# Altium PCB STM32 Home Automation.PcbDoc
Units mil, origin at the board's own origin, x right, y up, seen from the top; angles counter-clockwise.
Board outline 3639.49 x 2458.52 mil, 2 copper layers (Top Layer, Bottom Layer); 35 components, 55 nets, 218 pads, 83 vias.
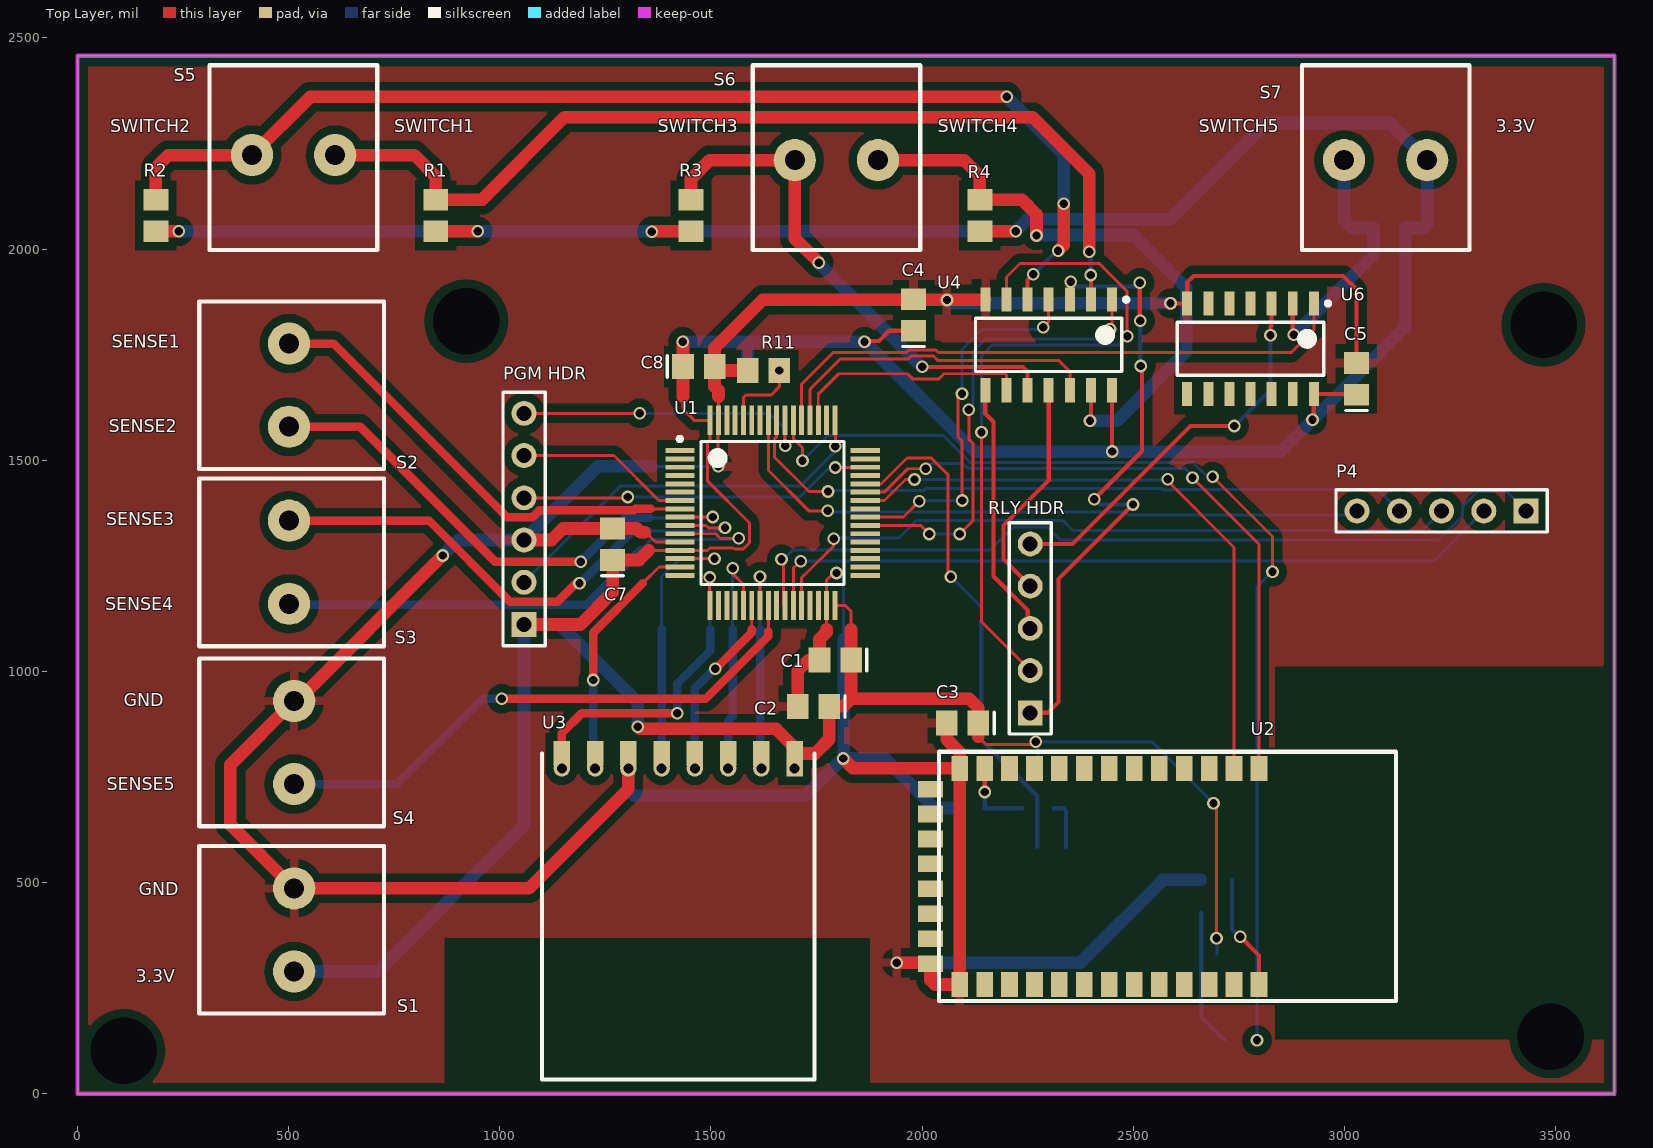
[diagram p0: Top Layer view]
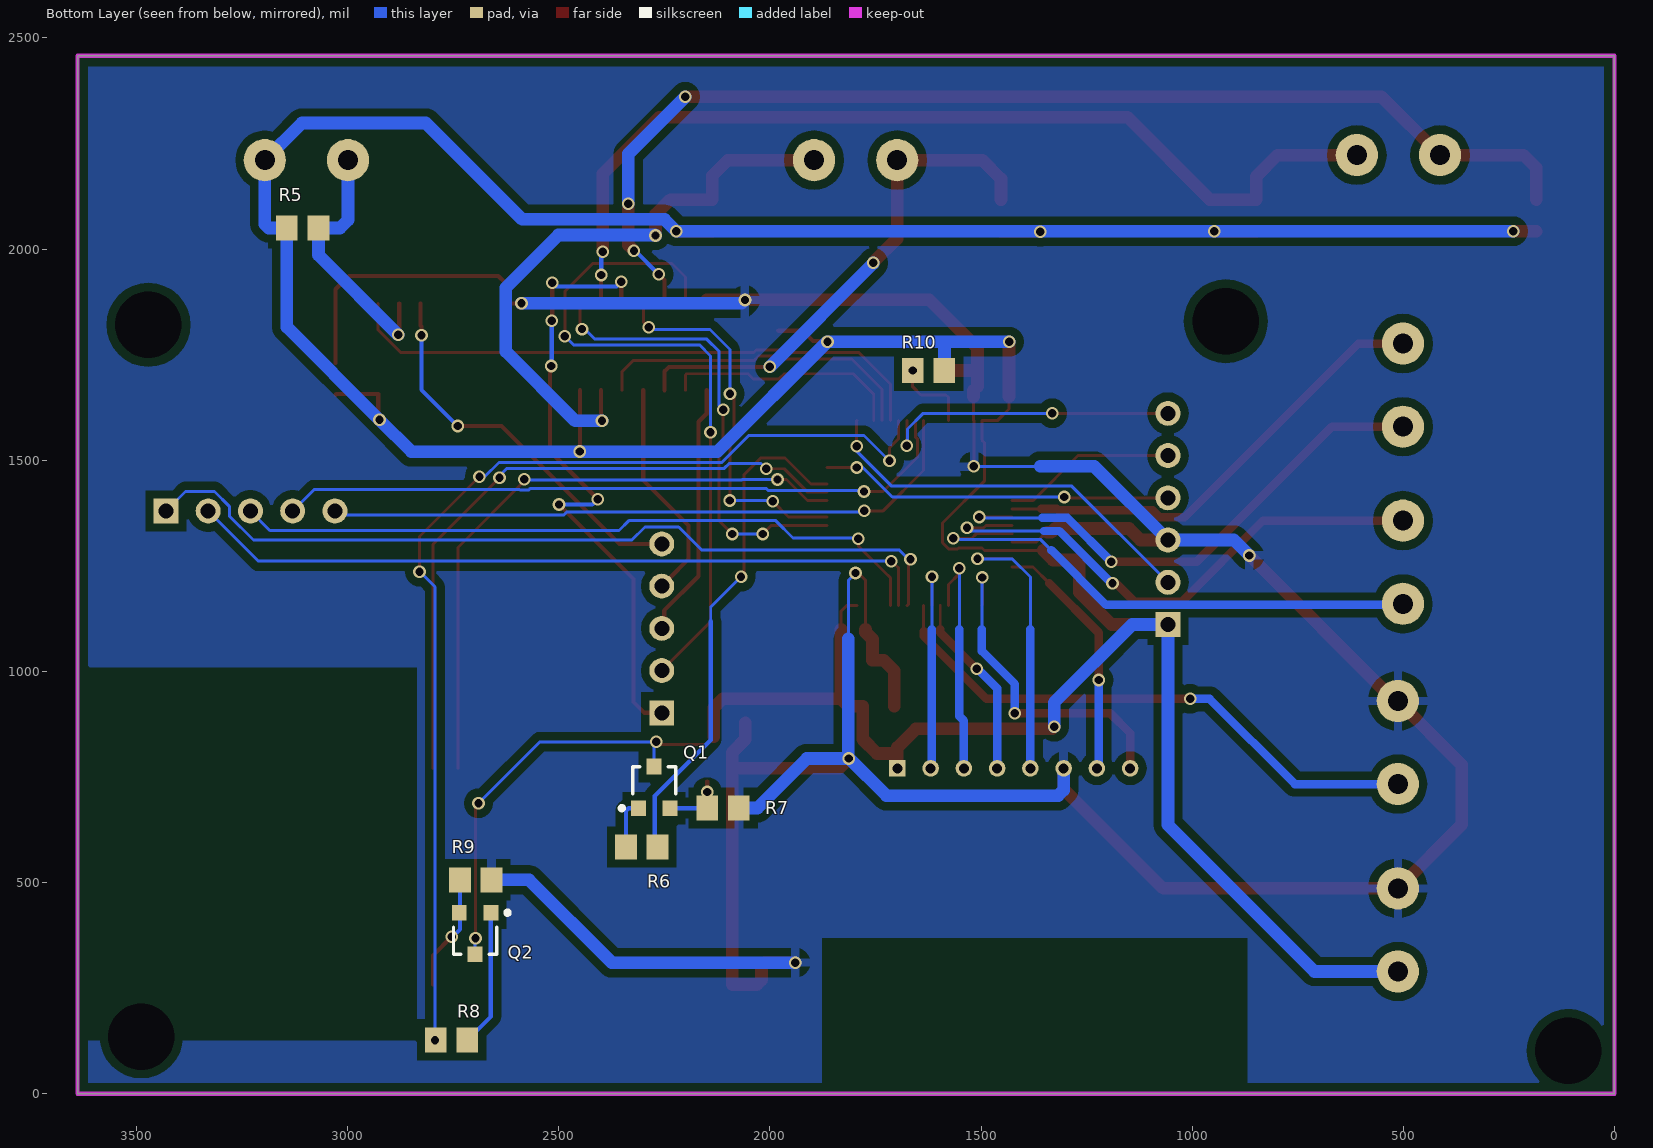
[diagram p1: Bottom Layer view, seen from below]

## Layer stack, top to bottom
Top Solder: solder mask 0.4, Solder Resist, Dk 3.5
Top Layer: signal copper 1.4
Dielectric 1: dielectric 12.6, FR-4, Dk 4.8
Bottom Layer: signal copper 1.4
Bottom Solder: solder mask 0.4, Solder Resist, Dk 3.5

## Board outline
0,0 0,2458.52 3639.49,2458.52 3639.49,0 0,0

## Design rules (kind name [scope] priority, off if disabled: settings)
Clearance [All] p1: gap=7 except(20: Fill-Poly Via-Poly SMDPad-Poly THPad-Poly Track-Poly)
PolygonConnect [All] p1: connectstyle=Relief reliefconductorwidth=20 reliefentries=4 polygonreliefangle="90 Angle" airgapwidth=20
RoomDefinition "STM32 Home Automation" [InComponentClass('STM32 Home Automation')] p1: confinementstyle=ConfineIn formatcopy=TRUE lockcomponents=FALSE outline 0,0 3639.49,0 3639.49,2458.52 0,2458.52
RoutingVias [All] p1: holewidth=19.68 width=30 viastyle="Through Hole" minholewidth=19.68 minwidth=30 maxholewidth=19.68 maxwidth=30
SMDNeckDown [All] p1: percent=70.000
SolderMaskExpansion [All] p1: expansion=4
SupplyNets [InNet('3.3V')] p1: voltage=3.300
UnpouredPolygon [All] p1: allowunpoured=FALSE
Width Sense [InNet('SENSE1','SENSE2','SENSE3','SENSE4','SENSE5')] p1: maxlimit=20 minlimit=7 preferedwidth=20
Width Power [InNet('3.3V','GND','SW_OUT1','SW_OUT2','SW_OUT3','SW_OUT4','SW_OUT5')] p2: maxlimit=60 minlimit=7 preferedwidth=30
Width [All] p3: maxlimit=20 minlimit=7 preferedwidth=7
29 further rules are at their usual default settings.

## Components (designator, comment, footprint, x,y, rotation, side; value= is the part's Value field where it differs from the comment)
C1 "100nF" 0805 1794.33,1026.88 r180 top
C2 "100nF" 0805 1742.77,917.21 r180 top
C3 "100nF" 0805 2095.67,878.12 r180 top
C4 "100nF" 0805 1980.03,1844.38 r90 top
C5 "100nF" 0805 3028.27,1692.85 r90 top
C7 "100nF" 0805 1267.07,1301.2 r90 top
C8 "100nF" 0805 1471.15,1721.64 r0 top
P4 "Header 5" HDR1X5 3430,1380 r180 top
"PGM HDR" "Header 6" HDR1X6 1057.43,1111.15 r90 top
Q1 "BC847ALT1" 318-08 2273.89,725.48 r180 bottom
Q2 "BC847ALT1" 318-08 2698.17,379.59 r0 bottom
R1 "100K" ERA-0805 848.3,2079.57 r90 top
R2 "100K" ERA-0805 185.42,2079.57 r90 top
R3 "100K" ERA-0805 1452.82,2079.57 r90 top
R4 "100K" ERA-0805 2136.59,2079.57 r90 top
R5 "100K" ERA-0805 3106.29,2049.99 r180 bottom
R6 "10K" ERA-0805 2303.42,584.49 r0 bottom
R7 "100K" ERA-0805 2110.73,676.63 r0 bottom
R8 "10K" ERA-0805 2753.58,127.66 r0 bottom
R9 "470E" ERA-0805 2696.49,506.4 r180 bottom
R10 "10K" ERA-0805 1624.08,1712.74 r0 bottom
R11 "470E" ERA-0805 1624.38,1712.47 r180 top
"RLY HDR" "Header 5" HDR1X5 2255.98,902.01 r90 top locked
S1 "Screw Terminal" "Screw Terminal" 513.04,290 r90 top
S2 "Screw Terminal" "Screw Terminal" 501.04,1775.92 r270 top
S3 "Screw Terminal" "Screw Terminal" 501.04,1356.59 r270 top
S4 "Screw Terminal" "Screw Terminal" 513.04,733.7 r90 top
S5 "Screw Terminal" "Screw Terminal" 609.68,2222.69 r180 top
S6 "Screw Terminal" "Screw Terminal" 1698.89,2210.69 r0 top
S7 "Screw Terminal" "Screw Terminal" 2999.56,2210.69 r0 top
U1 "STM32F051R8T6" STM32F051R8T6 1645.78,1375.27 r0 top
U2 "Bluetooth" Bluetooth 2797.58,770.67 r270 top
U3 "CC2500" CC2500 1698.04,770.6 r180 top
U4 "SN74LV86A" "SN74LV86A, SOIC127P600X175-14N" 2299.66,1773.16 r270 top
U6 "SN74LV86A" "SN74LV86A, SOIC127P600X175-14N" 2777.6,1764.06 r270 top

## Footprints (in the part's own frame and the unit in brackets; to place one, negate y for a bottom-side part, rotate by r counter-clockwise, add the part's x,y. Pads: shape width x height; smd on the part's side, far side on the other; paste and mask are expansions set on the pad)
318-08 [mm] "SOT-23; 3 Leads; Body 3.0 x 2.6 mm, inc. leads (LxW max)"
  rect 0.9x0.95 smd: 1(-0.95,-1.25) 2(0.95,-1.25) 3(0,1.25)
  silkscreen extent -2.08,-1.37 1.3,1.25
0805 [mm] "Chip Capacitor; Body 2.0 x 1.2 mm (LxW typ)"
  rect 1.3x1.5 smd: 1(-0.95,0) 2(0.95,0)
  silkscreen extent -1.9,-0.65 -1.9,0.65
Bluetooth [mm]
  rect 1.5x1 smd: 1(0,0) 2(0,-1.5) 3(0,-3) 4(0,-4.5) 5(0,-6) 6(0,-7.5) 7(0,-9) 8(0,-10.5) 9(0,-12) 10(0,-13.5) 11(0,-15) 12(0,-16.5) 13(0,-18) 22(13,-18) 23(13,-16.5) 24(13,-15) 25(13,-13.5) 26(13,-12) 27(13,-10.5) 28(13,-9) 29(13,-7.5) 30(13,-6) 31(13,-4.5) 32(13,-3) 33(13,-1.5) 34(13,0)
  rect 1x1.5 smd: 14(1.25,-19.75) 15(2.75,-19.75) 16(4.25,-19.75) 17(5.75,-19.75) 18(7.25,-19.75) 19(8.75,-19.75) 20(10.25,-19.75) 21(11.75,-19.75)
  silkscreen extent -1,-19.25 14,8.25
CC2500 [mm]
  rect 1x1 hole 0.6: 1(0,0)
  rect 1x1.5 smd: 1(0,-0.889) 2(2,-0.889) 3(4,-0.889) 4(6,-0.889) 5(8,-0.889) 6(10,-0.889) 7(12,-0.889) 8(14,-0.889)
  round 1 hole 0.6: 2(2,0) 3(4,0) 4(6,0) 5(8,0) 6(10,0) 7(12,0) 8(14,0)
  silkscreen extent -1.2,-0.89 15.2,18.71
ERA-0805 [mm] "Chip Resistor; Body 2 x 1.3 mm (LxW typ)"
  rect 1.3x1.5 smd: 1(-0.95,0) 2(0.95,0)
HDR1X5 [mm] "Connector; Header; 5 Position"
  rect 1.5x1.5 hole 0.9: 1(0,0)
  round 1.5 hole 0.9: 2(2.54,0) 3(5.08,0) 4(7.62,0) 5(10.16,0)
  silkscreen extent -1.27,-1.27 11.43,1.27
HDR1X6 [mm] "Connector; Header; 6 Position"
  rect 1.5x1.5 hole 0.9: 1(0,0)
  round 1.5 hole 0.9: 2(2.54,0) 3(5.08,0) 4(7.62,0) 5(10.16,0) 6(12.7,0)
  silkscreen extent -1.27,-1.27 13.97,1.27
"Screw Terminal" [mm]
  round 2.54 hole 1.2: 1(-0.011,0) 2(4.989,0)
  silkscreen extent -2.54,-5.41 7.54,5.72
"SN74LV86A, SOIC127P600X175-14N" [mm] "SOIC, 14-Leads, Body 8.65x3.90mm, Pitch 1.27mm, IPC Medium Density"
  rect 1.45x0.6 smd: 1(-2.725,3.81) 2(-2.725,2.54) 3(-2.725,1.27) 4(-2.725,0) 5(-2.725,-1.27) 6(-2.725,-2.54) 7(-2.725,-3.81) 8(2.725,-3.81) 9(2.725,-2.54) 10(2.725,-1.27) 11(2.725,0) 12(2.725,1.27) 13(2.725,2.54) 14(2.725,3.81)
  silkscreen extent -2.85,-4.4 1.6,4.79, body extent -2,-4.4 2,4.4, height 1.75
STM32F051R8T6 [mm] "TSQFP, 64-Leads, Body 12.2x12.2mm (max), Pitch 0.50mm, IPC Medium Density"
  rect 1.75x0.3 smd: 1(-5.575,3.75) 2(-5.575,3.25) 3(-5.575,2.75) 4(-5.575,2.25) 5(-5.575,1.75) 6(-5.575,1.25) 7(-5.575,0.75) 8(-5.575,0.25) 9(-5.575,-0.25) 10(-5.575,-0.75) 11(-5.575,-1.25) 12(-5.575,-1.75) 13(-5.575,-2.25) 14(-5.575,-2.75) 15(-5.575,-3.25) 16(-5.575,-3.75) 33(5.575,-3.75) 34(5.575,-3.25) 35(5.575,-2.75) 36(5.575,-2.25) 37(5.575,-1.75) 38(5.575,-1.25) 39(5.575,-0.75) 40(5.575,-0.25) 41(5.575,0.25) 42(5.575,0.75) 43(5.575,1.25) 44(5.575,1.75) 45(5.575,2.25) 46(5.575,2.75) 47(5.575,3.25) 48(5.575,3.75)
  rect 0.3x1.75 smd: 17(-3.75,-5.575) 18(-3.25,-5.575) 19(-2.75,-5.575) 20(-2.25,-5.575) 21(-1.75,-5.575) 22(-1.25,-5.575) 23(-0.75,-5.575) 24(-0.25,-5.575) 25(0.25,-5.575) 26(0.75,-5.575) 27(1.25,-5.575) 28(1.75,-5.575) 29(2.25,-5.575) 30(2.75,-5.575) 31(3.25,-5.575) 32(3.75,-5.575) 49(3.75,5.575) 50(3.25,5.575) 51(2.75,5.575) 52(2.25,5.575) 53(1.75,5.575) 54(1.25,5.575) 55(0.75,5.575) 56(0.25,5.575) 57(-0.25,5.575) 58(-0.75,5.575) 59(-1.25,5.575) 60(-1.75,5.575) 61(-2.25,5.575) 62(-2.75,5.575) 63(-3.25,5.575) 64(-3.75,5.575)
  silkscreen extent -5.7,-4.3 4.3,4.57, body extent -5,-5 5,5, height 1.6

## Part data
C1 C2 C3 C4 C5 C7 C8: library part C0805, "Ceramic Chip Capacitor - Standard"
P4 "RLY HDR": "Header, 5-Pin"
"PGM HDR": "Header, 6-Pin"
Q1 Q2: "General Purpose Transistor NPN Silicon"
R1 R2 R3 R4 R5 R6 R7 R8 R9 R10 R11: library part ERA6Y, "Rectangular Thick Film Chip Resistor, 10 Ohm to 1M Ohm Range, 0.1% and 0.5% Tolerance, 0805 Size, 0.1 W"

## Free pads (board coordinates)
  round 55.12 hole 157.48: 1(3471.49,1820.79) 2(3488.39,135.4) 3(109.17,101.61) 4(920.18,1829.24)

## Via types
v1: diameter 30, hole 19.68, Top Layer to Bottom Layer, 83 vias

## Nets (pads, with @x,y where several pads share a name; then routed paths per layer and width w, separated by ;. In a path a pad name is that pad's centre, name@x,y a point inside that pad or via, vN(x,y) a via of type N, cw(c..) or ccw(c..) an arc to the next point about the centre after c; other vN are vias at no path point)
3.3V: "PGM HDR.1" C1.1 C2.1 C3.1 C4.1 C5.1 C7.1 C8.1 Q1.3 Q2.3 R1.1 R2.1 R3.1 R4.1 R5.1 R10.1 S1.1 S7.2 U1.13 U1.32 U1.64 U3.1 U4.14 U6.14 | length 11482.3
  Top Layer w7: 1352.31,1286.69 U1.13 1491.82,1286.69 1497.71,1292.58 1552.82,1292.58 1555.45,1289.95 1576.57,1289.95 1591.51,1304.89 1591.51,1351.62 1491.41,1451.72 1491.41,1540.81 1498.15,1547.55 U1.64 1460.21,1594.76 1433.75,1621.22 1433.75,1651.02 ; U1.32 1818.47,1155.78 1831.73,1142.52 1831.73,1099.52 ; 2133.07,845.29 2151.11,827.24 2262.89,827.24 v1(2269.02,833.37) ; v1(2690.15,687.84) 2697.23,694.93 v1(2697.23,368.46)
  Top Layer w10: v1(1863.63,1780.56) 1865.68,1782.61 1897.84,1782.61 1922.21,1806.98 C4.1 ; U4.14 2449.66,1521.23 v1(2450.26,1520.64) ; v1(2924.27,1595.76) 2927.6,1599.09 U6.14 3026.94,1656.78 C5.1
  Top Layer w30: R2.1 v1(239.47,2042.17) ; R1.1 v1(947.48,2042.17) ; 1057.44,1111.14 1190.75,1111.14 1267.07,1187.47 C7.1 1329.42,1263.8 1352.31,1286.69 ; v1(1326.86,869.15) 1331.86,864.15 1653.84,864.15 1698.04,819.95 U3.1@1698.04,805.6 ; v1(1359.9,2041.08) 1361,2042.17 R3.1 ; v1(1433.48,1780.77) 1433.75,1780.49 C8.1 1433.75,1651.02 ; U3.1@1698.04,770.6 U3.1@1698.04,805.6 ; 1831.73,1099.52 C1.1 1831.73,934.97 ; 2133.07,845.29 C3.1 2133.07,913.61 2111.72,934.97 1831.73,934.97 ; R4.1 v1(2221.39,2042.17) ; U3.1@1698.04,805.6 1746.27,805.6 1780.17,839.5 C2.1 1813.98,917.21 1831.73,934.97
  Bottom Layer w7: Q1.3 2273.89,828.5 v1(2269.02,833.37) 2544.62,833.37 v1(2690.15,687.84) ; v1(2697.23,368.46) 2698.17,367.52 Q2.3
  Bottom Layer w10: v1(1863.63,1780.56) v1@1863.84,1780.77 ; v1@2449.64,1519.35 2450.26,1519.97 v1(2450.26,1520.64)
  Bottom Layer w30: v1(239.47,2042.17) v1(947.48,2042.17) v1(2221.39,2042.17) 2249.61,2070.4 2586.47,2070.4 2814.91,2298.84 3107.84,2298.84 S7.2 3195.98,2059.21 3186.76,2049.99 R5.1 3143.69,1815.17 v1(2924.27,1595.76) 2848.98,1520.47 2124.39,1520.47 1864.09,1780.77 1863.84,1780.77 1586.29,1780.77 ; S1.1 710.17,289.57 1057.44,636.84 1057.44,1111.14 1141.98,1111.14 1326.86,926.27 v1(1326.86,869.15) ; v1(1433.48,1780.77) 1586.29,1780.77 ; R10.1 1586.68,1780.38 1586.29,1780.77
BOOT0: R10.2 R11.1 U1.60 | length 188.4
  Top Layer w7: U1.60 1576.89,1649.01 1582.75,1654.87 1642.68,1654.87 1661.79,1673.97 v1(1661.79,1712.47)
  Bottom Layer w7: R10.2 v1(1661.79,1712.47)
BT_SW: R6.1 U1.44 | length 1206.8
  Top Layer w7: U1.44 1902.91,1444.17 1964.29,1505.54 2021.62,1505.54 2061.42,1465.75 2061.42,1231.11 v1(2068.17,1224.35)
  Bottom Layer w7: v1(2068.17,1224.35) 2140,1152.53 2140,1119.13
  Bottom Layer w10: 2140,1119.13 2140,837.97 2272.76,705.2 R6.1@2272.76,584.49
FIN_OUT1: "RLY HDR.1" U4.3 | length 1498.6
  Top Layer w10: 2255.98,902.01 2296.96,902.01 2322.8,927.85 2322.8,1218.73 v1(2499.49,1395.42) ; U4.3 2352.09,1882.86 v1(2352.09,1922.55) ; v1(2407.73,1408.11) 2520.96,1521.35 2520.96,1726.34 v1(2518.04,1723.42) ; v1(2515.11,1920.6) 2515.11,1832.14 v1(2516.76,1830.49)
  Bottom Layer w10: v1(2352.09,1922.55) 2362.86,1911.77 2506.28,1911.77 v1(2515.11,1920.6) ; v1(2407.73,1408.11) 2420.42,1395.42 v1(2499.49,1395.42) ; v1(2516.76,1830.49) 2516.76,1727.99 2515.11,1726.34 v1(2518.04,1723.42)
FIN_OUT2: "RLY HDR.2" U4.6 | length 1643.5
  Top Layer w7: v1(2140.42,1566.66) 2140.42,1117.57 2255.98,1002.01 ; U4.6 2199.66,1933.98 2231.6,1965.91 2419.4,1965.91 2485.64,1899.67 2485.57,1899.59 v1(2485.57,1793.94)
  Bottom Layer w7: v1(2140.42,1566.66) 2140.42,1747.16 2166.09,1772.82 2464.45,1772.82 v1(2485.57,1793.94)
FIN_OUT3: "RLY HDR.3" U4.8 | length 607.9
  Top Layer w10: U4.8 2149.66,1610.33 2168.85,1591.14 2168.85,1225.43 2250.36,1143.92 2250.36,1107.63 2255.98,1102.01
FIN_OUT4: "RLY HDR.4" U4.11 | length 534.6
  Top Layer w10: 2255.98,1202.01 2238.64,1219.35 2238.91,1219.62 2192.68,1265.85 2192.68,1345.32 2299.66,1452.3 U4.11
FIN_OUT5: "RLY HDR.5" U6.3 | length 925.6
  Top Layer w10: 2255.98,1302.01 2355.86,1302.01 2635.19,1581.34 v1(2739.28,1581.34) ; v1(2824.74,1796.1) 2824.74,1816.52 2827.6,1819.39 U6.3
  Bottom Layer w10: v1(2739.28,1581.34) 2824.74,1666.8 v1(2824.74,1796.1)
GDO0: U1.15 U3.7 | length 592.4
  Top Layer w7: 1338.73,1209.05 1377,1247.32 U1.15
  Top Layer w20: v1(1221.18,979.62) 1221.18,1091.5 1338.73,1209.05
  Bottom Layer w20: v1(1221.18,979.62) 1221.18,775.02 U3.7@1225.6,770.6
GDO2: U1.14 U3.5 | length 678.2
  Top Layer w7: U1.14 1508.2,1267 v1(1508.27,1267.08)
  Bottom Layer w7: 1383.08,1099.52 1383.08,1223.54 1425.47,1265.93 1507.13,1265.93 v1(1508.27,1267.08)
  Bottom Layer w20: U3.5@1383.08,770.6 1383.08,1099.52
GND: "PGM HDR.3" C1.2 C2.2 C3.2 C4.2 C5.2 C7.2 C8.2 R7.1 R9.2 R11.2 S1.2 S4.2 U1.12 U1.31 U1.63 U2.13 U2.21 U2.22 U3.6 U4.7 U6.7 | length 9174.2
  Top Layer w7: 1342.82,1329.36 1345.7,1329.36 1368.69,1306.37 U1.12 ; v1(1516.91,1485.83) 1516.91,1593.84 U1.63 1517.83,1651.02 ; 1773.74,1099.52 U1.31 1773.74,1215.91 1790.93,1233.1 v1(1797.07,1233.1)
  Top Layer w10: v1@2588.49,1871.35 U6.7 2627.6,1921.22 2643.09,1936.71 2996.72,1936.71 3028.27,1905.16 C5.2
  Top Layer w30: v1(864.64,1274.52) 520.25,930.13 S4.2 361.7,778.79 361.7,637.76 S1.2 1068.88,486.42 1304.34,721.89 U3.6@1304.34,770.6 ; 1057.44,1311.14 1122.24,1311.14 1149.7,1338.6 C7.2 1324.52,1338.6 1333.76,1329.36 1342.82,1329.36 ; 1517.83,1651.02 1517.83,1665.41 1508.55,1674.69 C8.2 ; R11.2 1517.71,1712.47 C8.2 ; C2.2 1705.36,1001.25 1731,1026.88 C1.2 1756.93,1076.14 1773.74,1092.94 1773.74,1099.52 ; v1(1813.11,793.79) 1836.22,770.67 U2.13 ; v1(1939.55,310.4) 2012.16,310.4 2017.25,305.3 U2.21 2020.02,269.44 2030.6,258.86 U2.22 U2.13 ; C3.2 2058.27,839.43 2088.92,808.78 U2.13 ; U4.7 1623.4,1880.44 1508.55,1765.59 C8.2 ; v1(2588.27,1871.56) v1@2588.49,1871.35
  Bottom Layer w7: 1360.16,1485.83 v1(1516.91,1485.83) ; v1(1797.07,1233.1) 1814.05,1216.12 1814.05,1077.41
  Bottom Layer w30: v1(864.64,1274.52) 901.3,1311.18 1057.4,1311.18 1057.44,1311.14 1232.12,1485.83 1360.16,1485.83 ; U3.6@1304.34,770.6 1304.34,719.14 1317.46,706.02 1723.93,706.02 ; v1@1812.4,794.5 1723.93,706.02 ; v1(1813.11,793.79) 1912.32,793.79 2029.48,676.63 R7.1 ; 1814.05,1077.41 1814.05,796.14 1723.93,706.02 ; v1(1939.55,310.4) 2374.41,310.4 2570.42,506.4 R9.2 ; v1(2059.02,1879.38) 2066.84,1871.56 v1(2588.27,1871.56)
HI/LOW1: P4.1 U1.26 | length 2001.2
  Top Layer w7: v1(1666.94,1265.93) 1672.03,1260.84 1672.03,1159.06 U1.26
  Bottom Layer w7: v1(1666.94,1265.93) 1671.98,1265.93 1694.05,1288 2161.96,1288 2216,1342.04 2296,1342.04 2327.04,1311 3223,1311 3280,1368 3280,1391 3315,1426 3384,1426 P4.1
HI/LOW2: P4.2 U1.27 | length 1780.4
  Top Layer w7: U1.27 1695,1244.95 1702.31,1252.26 1710.82,1260.78 v1(1712.31,1260.78)
  Bottom Layer w7: v1(1712.31,1260.78) 1717.96,1260.78 1717.96,1261 2818.66,1261 2818.9,1261.24 2840.03,1261.24 2840.26,1261 3211,1261 P4.2
HI/LOW3: P4.3 U1.28 | length 1676
  Top Layer w7: U1.28 1714.68,1221.68 1728.28,1235.28 1728.53,1235.28 1790.49,1297.24 v1(1790.49,1314.38)
  Bottom Layer w7: v1(1790.49,1314.38) 1791.86,1315.75 1809,1315.75 1809,1316 1945,1316 1985.92,1356.92 2334.08,1356.92 2357,1334 3184,1334 P4.3
HI/LOW4: P4.4 U1.56 | length 1628.8
  Top Layer w7: U1.56 1655.63,1555.63 1650,1550 1650,1508 1732,1426 v1(1777,1426)
  Bottom Layer w7: v1(1777,1426) 1779.75,1428.75 2004.11,1428.75 2008.97,1433.61 2567.19,1433.61 2570.84,1429.97 2591.96,1429.97 2592.42,1430.43 3079.57,1430.43 P4.4
HI/LOW5: P4.5 U1.57 | length 1562.4
  Top Layer w7: U1.57 1635.94,1476.06 1731.75,1380.25 v1(1776.84,1380.25)
  Bottom Layer w7: v1(1776.84,1380.25) 1776.84,1377.75 2481.1,1377.75 2488.93,1369.92 3019.92,1369.92 P4.5
HI/LOW6: U1.58
HI/LOW7: U1.59
HI/LOW8: U1.61
KEY_FOR_AT_CMD: R8.2 U1.54 | length 2556.4
  Top Layer w7: U1.54 1695,1551.43 1716.85,1529.58 v1(1716.85,1498.55) ; v1(2687.8,1461.38) 2829.46,1319.71 v1(2829.46,1235.74) ; v1(2792.76,126.56) v1@2796.67,130.47
  Bottom Layer w7: v1(1716.85,1498.55) 1776.95,1558.65 2050.15,1558.65 2113.83,1494.97 2641.37,1494.97 2674.96,1461.38 v1(2687.8,1461.38) ; v1(2792.76,126.56) 2792.76,1200.4 2828.1,1235.74 v1(2829.46,1235.74)
KEY_PIN: Q2.2 R9.1 U2.34 | length 275.1
  Top Layer w10: v1(2753.21,372) 2797.58,327.63 U2.34
  Bottom Layer w10: R9.1 2733.89,389.36 2751.25,372 v1(2753.21,372)
NetQ1_1: Q1.1 R6.2 | length 119.2
  Bottom Layer w10: Q1.1@2312.49,675.07 Q1.1 2334.27,676.27 2340.82,669.72 R6.2
NetQ1_2: Q1.2 R7.2 U2.12 | length 151.3
  Top Layer w10: v1(2148.13,714.68) 2148.13,739.44
  Bottom Layer w7: R7.2 R7.2@2148.49,676.27
  Bottom Layer w10: R7.2 v1(2148.13,714.68) ; R7.2@2148.49,676.27 Q1.2
NetQ2_1: Q2.1 R8.1 | length 324.1
  Bottom Layer w10: Q2.1 2660.77,183.07 R8.1
NRST: "PGM HDR.5" U1.7 | length 412.9
  Top Layer w7: 1057.44,1511.14 1270.12,1511.14 1376.46,1404.8 U1.7
OUT1: U1.39 U4.1 | length 1103.6
  Top Layer w7: U1.39 1996.84,1345.74 v1(2017.08,1325.5) ; v1(2088.82,1325.5) 2120.45,1357.12 2120.45,1539.97 2110.58,1549.83 v1(2110.58,1619.56) ; v1(2444.84,1810.67) 2449.66,1815.5 U4.1
  Bottom Layer w7: v1(2017.08,1325.5) v1(2088.82,1325.5) ; v1(2110.58,1619.56) 2120.01,1628.99 2120.01,1757.38 2149.45,1786.82 2414.35,1786.82 2438.2,1810.67 v1(2444.84,1810.67)
OUT2: U1.40 U4.4 | length 896.3
  Top Layer w7: U1.40 1955.65,1365.43 v1(1993.55,1403.25) v1(1993.55,1403.25) ; v1(2094.51,1657.62) 2085.08,1648.19 2085.08,1554.95 2094.95,1545.09 v1(2094.95,1404.93) ; v1(2286.49,1814.83) 2299.66,1828 U4.4
  Bottom Layer w7: v1(1993.55,1403.25) 1995.23,1404.93 v1(2094.95,1404.93) ; v1(2094.51,1657.62) 2094.51,1762.43 2141.73,1809.64 2281.3,1809.64 v1(2286.49,1814.83)
OUT3: U1.51 U4.9 | length 574.7
  Top Layer w7: U1.51 1754.05,1656.4 1802.56,1704.92 1965.53,1704.92 1977.58,1692.87 2040.03,1692.87 2052.07,1704.92 2196.73,1704.92 2199.66,1701.99 U4.9
OUT4: U1.52 U4.12 | length 780.6
  Top Layer w7: U1.52 1734.37,1667.95 1806.01,1739.59 1967.01,1739.59 1974.1,1746.68 2026.9,1746.68 2036.9,1736.68 2323.24,1736.68 2349.66,1710.25 U4.12
OUT5: U1.53 U6.1 | length 1419.7
  Top Layer w7: U1.53 1713.87,1595.57 1713.87,1679.51 1789.42,1755.06 1962.68,1755.06 1968.3,1760.68 2032.69,1760.68 2038.32,1755.06 2874.04,1755.06 2927.6,1808.62 U6.1
OUT6: U1.2
OUT7: U1.3
OUT8: U1.4
SENSE1: S2.1 U1.8 | length 1104.3
  Top Layer w7: 1357.72,1385.11 U1.8
  Top Layer w20: S2.1 606.51,1776.35 1018.24,1364.62 1076.71,1364.62 1093.29,1381.19 1303.64,1381.19 1316.78,1381.19 1320.7,1385.11 1357.72,1385.11
SENSE2: S2.2 U1.9 | length 1257.9
  Top Layer w7: U1.9 1504.26,1365.43 v1(1504.45,1365.62)
  Top Layer w20: S2.2 669.43,1579.49 989.08,1259.84 v1(1191.57,1259.84)
  Bottom Layer w7: 1355.11,1363.49 1502.33,1363.49 v1(1504.45,1365.62)
  Bottom Layer w20: v1(1191.57,1259.84) 1295.22,1363.49 1355.11,1363.49
SENSE3: S3.1 U1.10 | length 1294.2
  Top Layer w7: U1.10 1488.26,1345.74 1493.89,1340.12 1533.07,1340.12 v1(1533.32,1340.37)
  Top Layer w20: S3.1 832.4,1357.02 1024.8,1164.62 1136.02,1164.62 1180.37,1208.97 v1(1188.78,1208.97)
  Bottom Layer w7: 1351.48,1332.51 1525.46,1332.51 v1(1533.32,1340.37)
  Bottom Layer w20: v1(1188.78,1208.97) 1190.85,1208.97 1314.4,1332.51 1351.48,1332.51
SENSE4: S3.2 U1.11 | length 1275.9
  Top Layer w7: U1.11 1511.57,1326.06 1522.76,1314.87 1565.43,1314.87 v1(1566.01,1315.45)
  Bottom Layer w7: 1333.49,1287.16 1358.34,1312.01 1562.57,1312.01 v1(1566.01,1315.45)
  Bottom Layer w20: S3.2 503.54,1157.67 1204,1157.67 1333.49,1287.16
SENSE5: S4.1 U1.24 | length 1340
  Top Layer w7: 1635.94,1095.51 U1.24
  Top Layer w20: v1(1004.94,935.13) 1487.11,935.13 1635.94,1083.96 1635.94,1095.51
  Bottom Layer w20: S4.1 756.94,733.28 958.79,935.13 v1(1004.94,935.13)
SENSE6: U1.25
SENSE7: U1.37
SENSE8: U1.38
SPI1_CS: U1.17 U3.8 | length 797.6
  Top Layer w7: v1(1496.97,1222.69) 1496.97,1156.96 U1.17
  Top Layer w20: U3.8@1146.86,770.6 1146.86,853.86 1194.15,901.15 v1(1419.88,901.15)
  Bottom Layer w7: v1(1496.97,1222.69) 1498.06,1221.59 1498.06,1099.52
  Bottom Layer w20: v1(1419.88,901.15) 1419.88,969.97 1498.06,1048.15 1498.06,1099.52
SPI1_MISO: U1.22 U3.4 | length 442.5
  Top Layer w7: 1596.57,1099.52 U1.22
  Top Layer w20: v1(1510.37,1006.05) 1596.57,1092.26 1596.57,1099.52
  Bottom Layer w20: U3.4@1461.82,770.6 1461.82,960.17 1507.71,1006.05 v1(1510.37,1006.05)
SPI1_MOSI: U1.23 U3.2 | length 523.8
  Top Layer w7: U1.23 v1@1616.26,1224.44
  Bottom Layer w7: 1616.27,1099.52 v1(1616.27,1224.46)
  Bottom Layer w20: 1616.27,1099.52 1616.27,773.64 U3.2@1619.3,770.6
SPI1_SCK: U1.21 U3.3 | length 576.7
  Top Layer w7: v1(1551.33,1244.01) 1551.33,1231.54 1576.89,1205.98 U1.21
  Bottom Layer w7: 1551.33,1099.52 v1(1551.33,1244.01)
  Bottom Layer w20: U3.3@1540.56,770.6 1540.56,883.2 1551.33,893.97 1551.33,1099.52
SW_OUT1: R1.2 S5.1 U4.2 | length 2297.6
  Top Layer w10: v1(2399.3,1938.77) 2399.66,1938.41 U4.2
  Top Layer w30: S5.1 797.57,2222.69 848.3,2171.97 R1.2 957.91,2116.98 1153.39,2312.45 2261.57,2312.45 2395.9,2178.12 v1(2395.9,1993.9)
  Bottom Layer w10: v1(2395.9,1993.9) 2399.3,1990.5 v1(2399.3,1938.77)
SW_OUT2: R2.2 S5.2 U4.5 | length 2733.4
  Top Layer w10: U4.5 2249.66,1926.74 v1(2263.33,1940.41)
  Top Layer w30: R2.2 185.42,2193.1 215.01,2222.69 S5.2 551.33,2360.76 v1(2200.17,2360.76) ; v1(2321.96,1996.4) 2335.05,2009.49 v1(2335.05,2107.4)
  Bottom Layer w10: v1(2263.33,1940.41) 2319.32,1996.4 v1(2321.96,1996.4)
  Bottom Layer w30: v1(2200.17,2360.76) 2335.05,2225.89 v1(2335.05,2107.4)
SW_OUT3: R3.2 S6.1 U4.10 | length 1226.5
  Top Layer w10: v1(2000.23,1721.18) 2239.07,1721.18 2249.66,1710.59 U4.10
  Top Layer w30: R3.2 1452.82,2166.46 1497.05,2210.69 S6.1 1698.46,2025.05 v1(1755.4,1968.11)
  Bottom Layer w30: v1(1755.4,1968.11) 1755.4,1966.02 v1(2000.23,1721.18)
SW_OUT4: R4.2 S6.2 U4.13 | length 1438.6
  Top Layer w10: v1(2397.32,1593.52) 2399.66,1595.86 U4.13
  Top Layer w30: S6.2 2099.31,2210.69 2136.59,2173.41 R4.2 2236.18,2116.98 2270.98,2082.17 v1(2270.98,2032.3)
  Bottom Layer w30: v1(2270.98,2032.3) 2272.08,2033.4 2500.77,2033.4 2625.27,1908.9 2625.27,1757.72 2461.07,1593.52 v1(2397.32,1593.52)
SW_OUT5: R5.2 S7.1 U6.2 | length 625.4
  Top Layer w10: U6.2 2877.6,1799.91 v1(2880.22,1797.29)
  Bottom Layer w30: v1(2880.22,1797.29) 3068.89,1985.96 R5.2 3017.96,2049.99 2999.13,2068.82 S7.1
SWCLK: "PGM HDR.2" U1.49 | length 939.2
  Top Layer w7: U1.49 1794.35,1593.83 v1(1794.35,1533.15)
  Bottom Layer w7: 1057.44,1211.14 1284.99,1438.69 1711.68,1438.69 1794.35,1521.37 v1(1794.35,1533.15)
SWDIO: "PGM HDR.4" U1.46 | length 838.6
  Top Layer w7: 1057.44,1411.14 v1@1305.04,1411.14 ; v1(1794,1483.06) U1.46@1865.27,1483.06
  Bottom Layer w7: v1(1303.26,1413.19) 1710.17,1413.19 1780.03,1483.06 v1(1794,1483.06)
SWO: "PGM HDR.6" U1.55 | length 732.8
  Top Layer w7: 1057.44,1611.14 v1(1331.16,1611.14) ; U1.55 1675.31,1535.06 v1(1675.88,1534.49)
  Bottom Layer w7: v1(1331.16,1611.14) 1636.98,1611.14 1673.88,1574.24 1673.88,1536.48 v1(1675.88,1534.49)
USART1_RX: U1.43 U2.1 | length 1573.1
  Top Layer w7: U1.43 1910.42,1424.48 1965.96,1480.03 2002.71,1480.03 v1(2008.6,1480.04) ; v1(2640.25,1458.43) 2797.58,1301.1 U2.1
  Bottom Layer w7: v1(2008.6,1480.04) 2021.19,1492.63 2096.36,1492.63 2108.03,1480.97 2622.48,1480.97 2640.25,1463.2 v1(2640.25,1458.43)
USART1_TX: U1.42 U2.2 | length 1493.9
  Top Layer w7: U1.42 1911,1404.8 1960.73,1454.53 v1(1981.8,1454.53) ; v1(2581.4,1455.47) 2576.75,1455.47 2738.53,1293.69 U2.2
  Bottom Layer w7: v1(1981.8,1454.53) 2066.55,1454.53 ; 2066.55,1453.67 2579.6,1453.67 v1(2581.4,1455.47)
pads on no net: U1.1 U1.5 U1.6 U1.16 U1.18 U1.19 U1.20 U1.29 U1.30 U1.33 U1.34 U1.35 U1.36 U1.41 U1.45 U1.47 U1.48 U1.50 U1.62 U2.3 U2.4 U2.5 U2.6 U2.7 U2.8 U2.9 U2.10 U2.11 U2.14 U2.15 U2.16 U2.17 U2.18 U2.19 U2.20 U2.23 U2.24 U2.25 U2.26 U2.27 U2.28 U2.29 U2.30 U2.31 U2.32 U2.33 U6.4 U6.5 U6.6 U6.8 U6.9 U6.10 U6.11 U6.12 U6.13

## Polygon pours and split planes (outlines as drawn)
GND on Top Layer "Top Overlay-No Net" (solid, remove dead copper, pour order 4): 0,0 0,2458.52 3639.49,2458.52 3639.49,0 0,0
GND on Bottom Layer "Top Overlay-No Net" (solid, remove dead copper, pour order 6): 0,0 0,2458.52 3639.49,2458.52 3639.49,0 0,0

## Keep-outs
Keep-Out Layer:
  lines w10: 0,0 0,2457.84 3639.49,2457.84 3639.49,0 0,0

## Other copper
Top Layer:
  pour cut-out: 3633.18,1011.94 3633.17,127.62 2835.27,127.62 2835.27,1011.94
  pour cut-out: 867.89,-0.04 867.89,369.16 1876.82,369.16 1876.82,0 867.92,0
Bottom Layer:
  pour cut-out: 3633.19,1010.24 3633.17,125.91 2835.27,125.91 2835.27,1010.24
  pour cut-out: 867.89,-0.04 867.89,369.16 1876.82,369.16 1876.82,0 867.92,0

## Silkscreen, mask and mechanical layers (free items; w line width, h text height)
Top Overlay:
  text "SWITCH2" at 77.34,2276.85 h30
  text "SWITCH1" at 750.42,2276.85 h30
  text "SWITCH3" at 1374.02,2276.85 h30
  text "SWITCH4" at 2037.44,2276.85 h30
  text "SWITCH5" at 2654.53,2276.85 h30
  text "3.3V" at 3358.48,2276.85 h30
  text "SENSE1" at 81.53,1767.04 h30
  text "SENSE2" at 73.43,1566.32 h30
  text "SENSE3" at 68.57,1346.18 h30
  text "SENSE4" at 65.34,1145.47 h30
  text "GND" at 109.05,917.24 h30
  text "SENSE5" at 69.39,718.15 h30
  text "GND" at 144.66,469.69 h30
  text "3.3V" at 137.38,264.11 h30

## Dimensions
0,0 to 0,2458.52 on Mechanical 1
0,0 to 3639.49,0 on Mechanical 1